# Altium PCB 6-Safety-Relay-PCB.PcbDoc
Units mm, origin at the board's own origin, x right, y up, seen from the top; angles counter-clockwise.
Board outline 118.11 x 88.58 mm, 2 copper layers (Top Layer, Bottom Layer); 10 components, 29 nets, 101 pads, 13 vias.
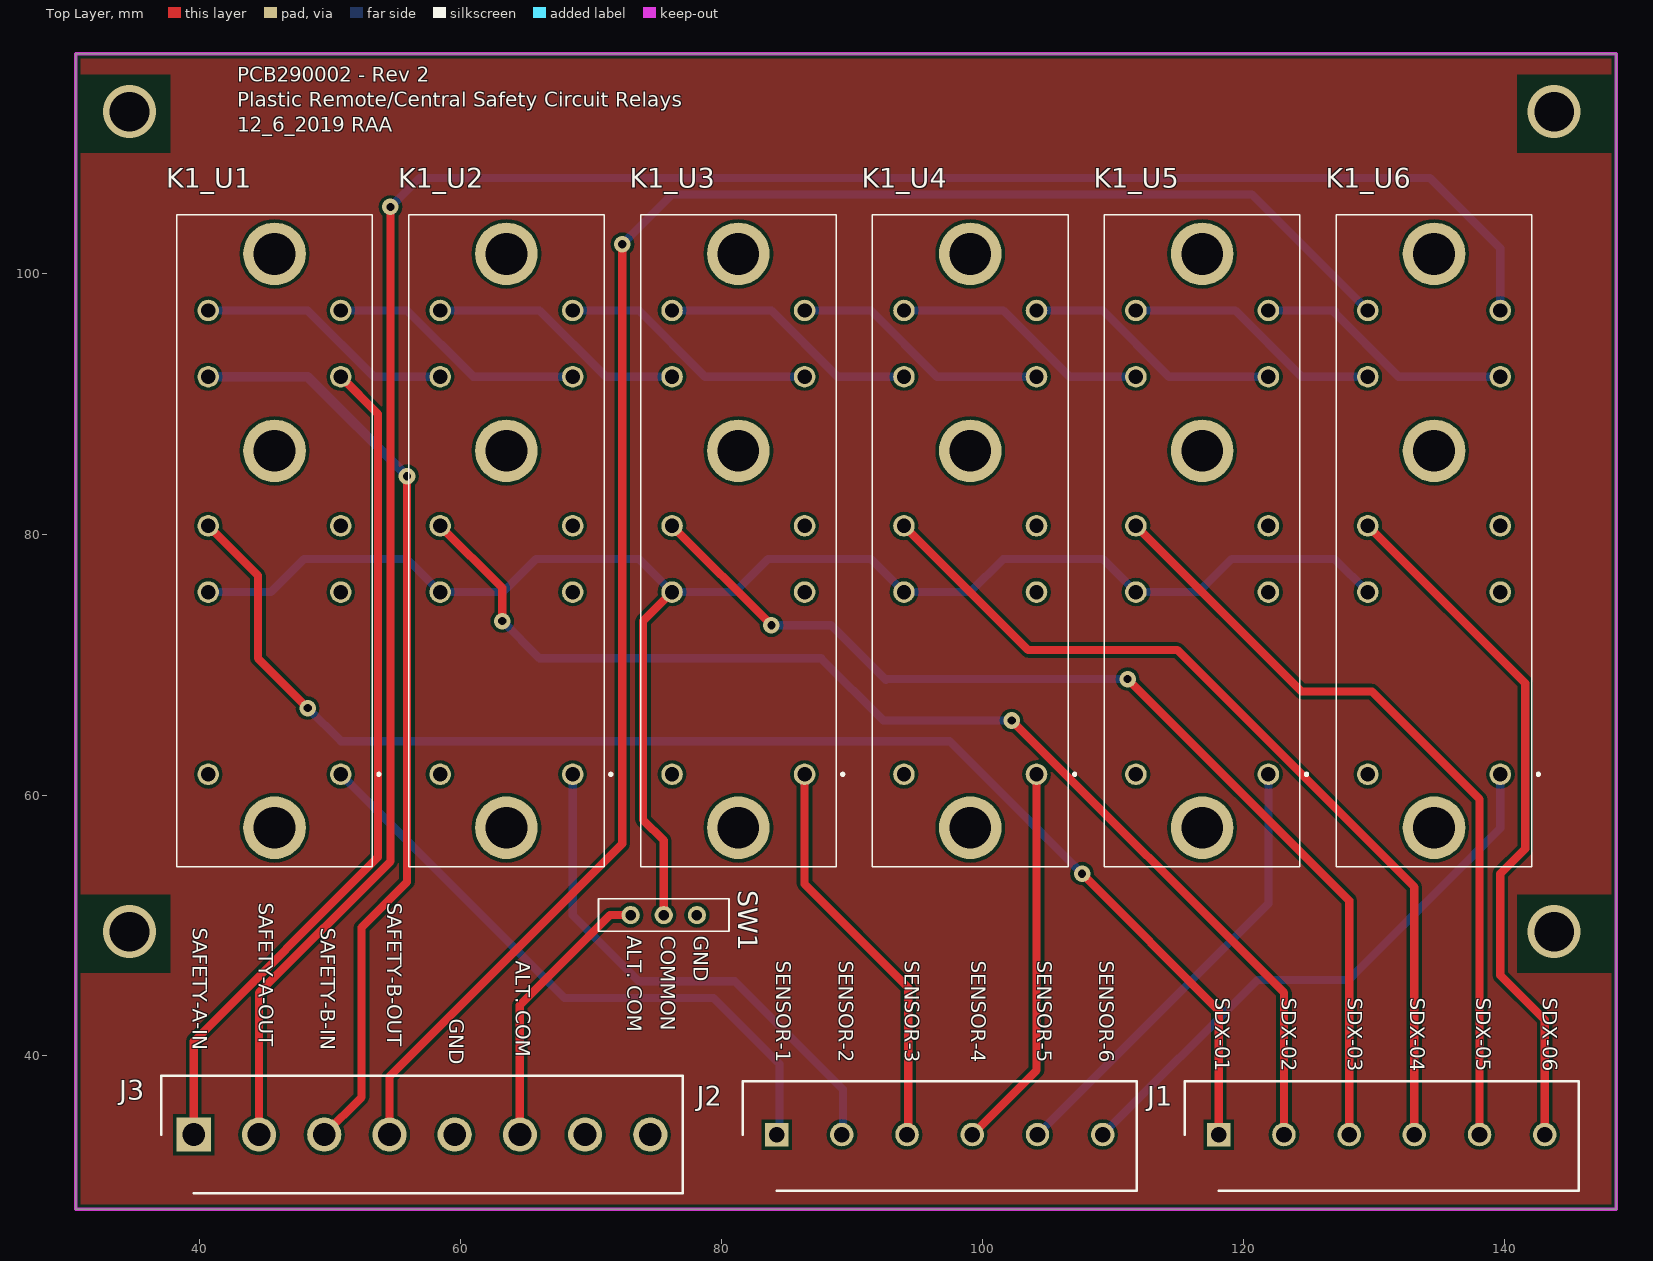
[diagram p0: Top Layer view]
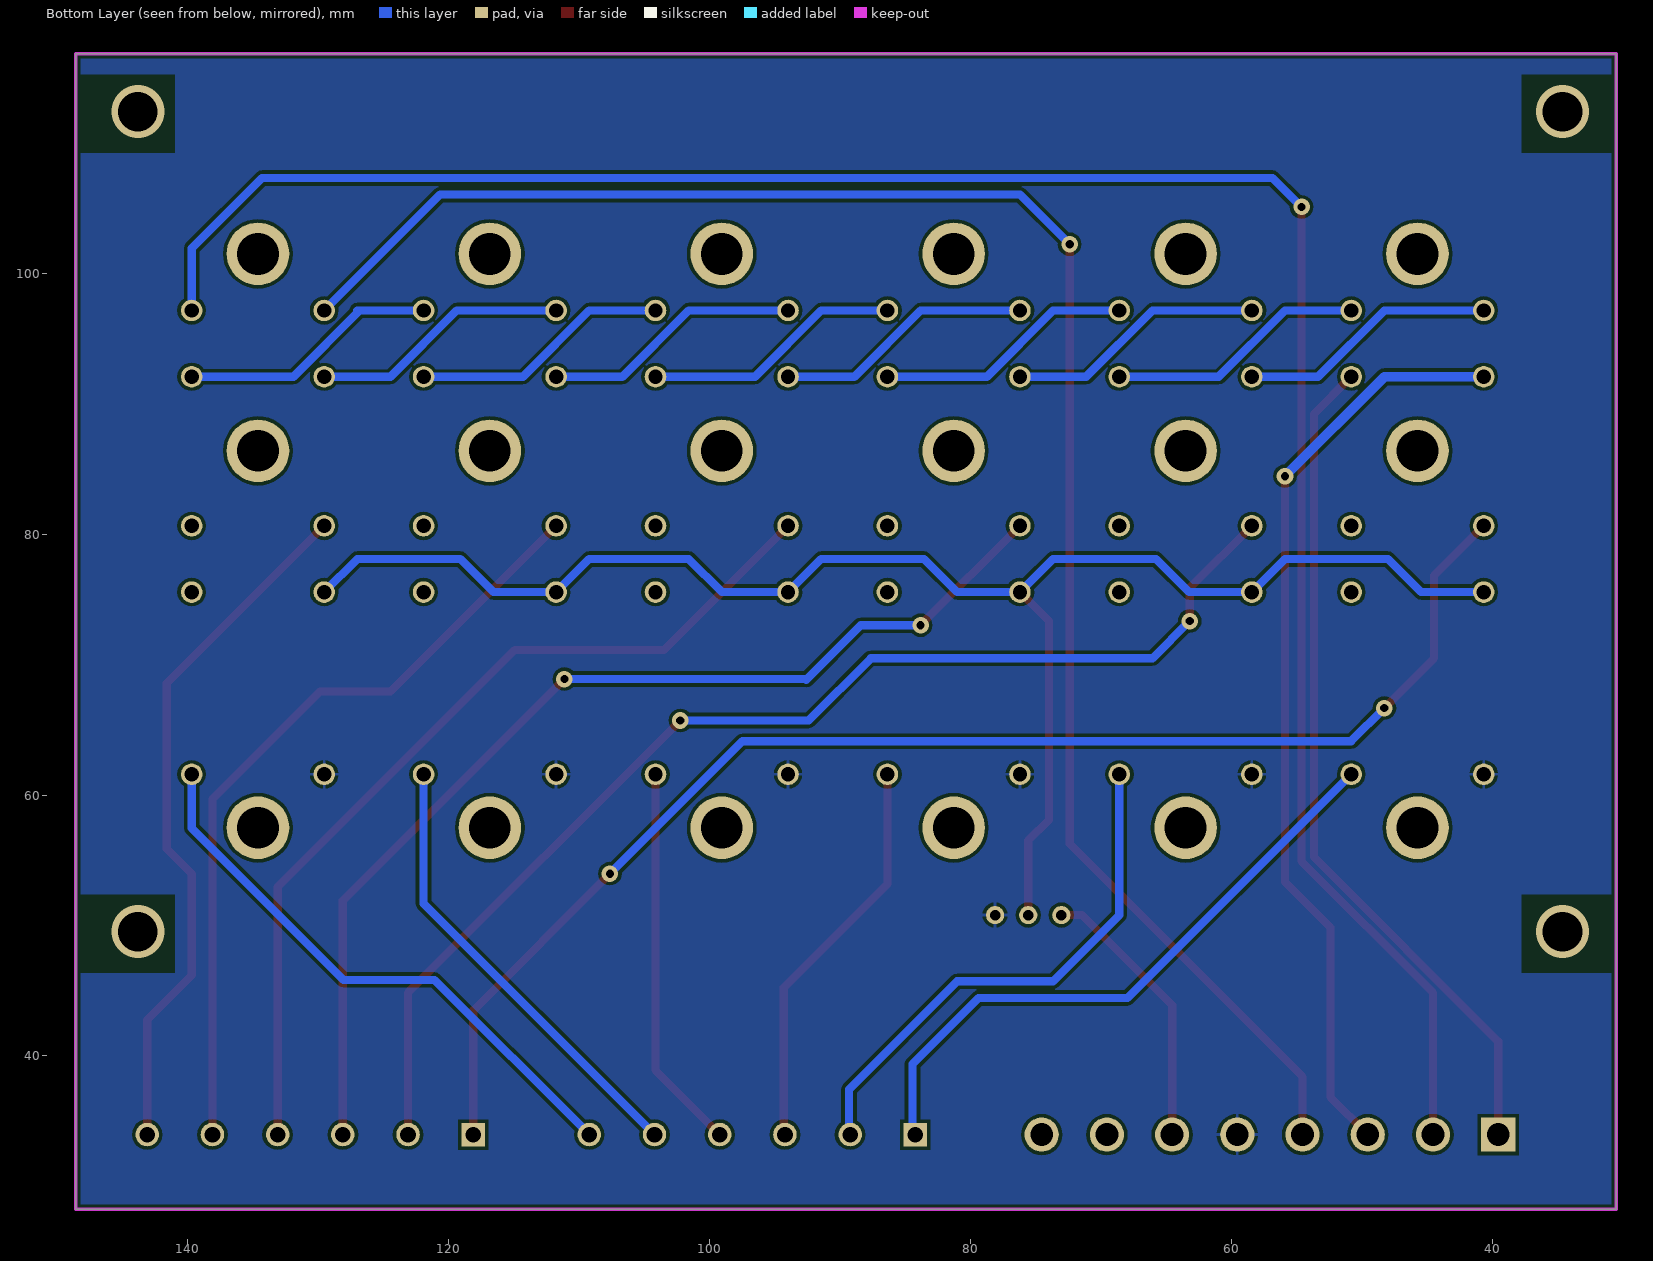
[diagram p1: Bottom Layer view, seen from below]
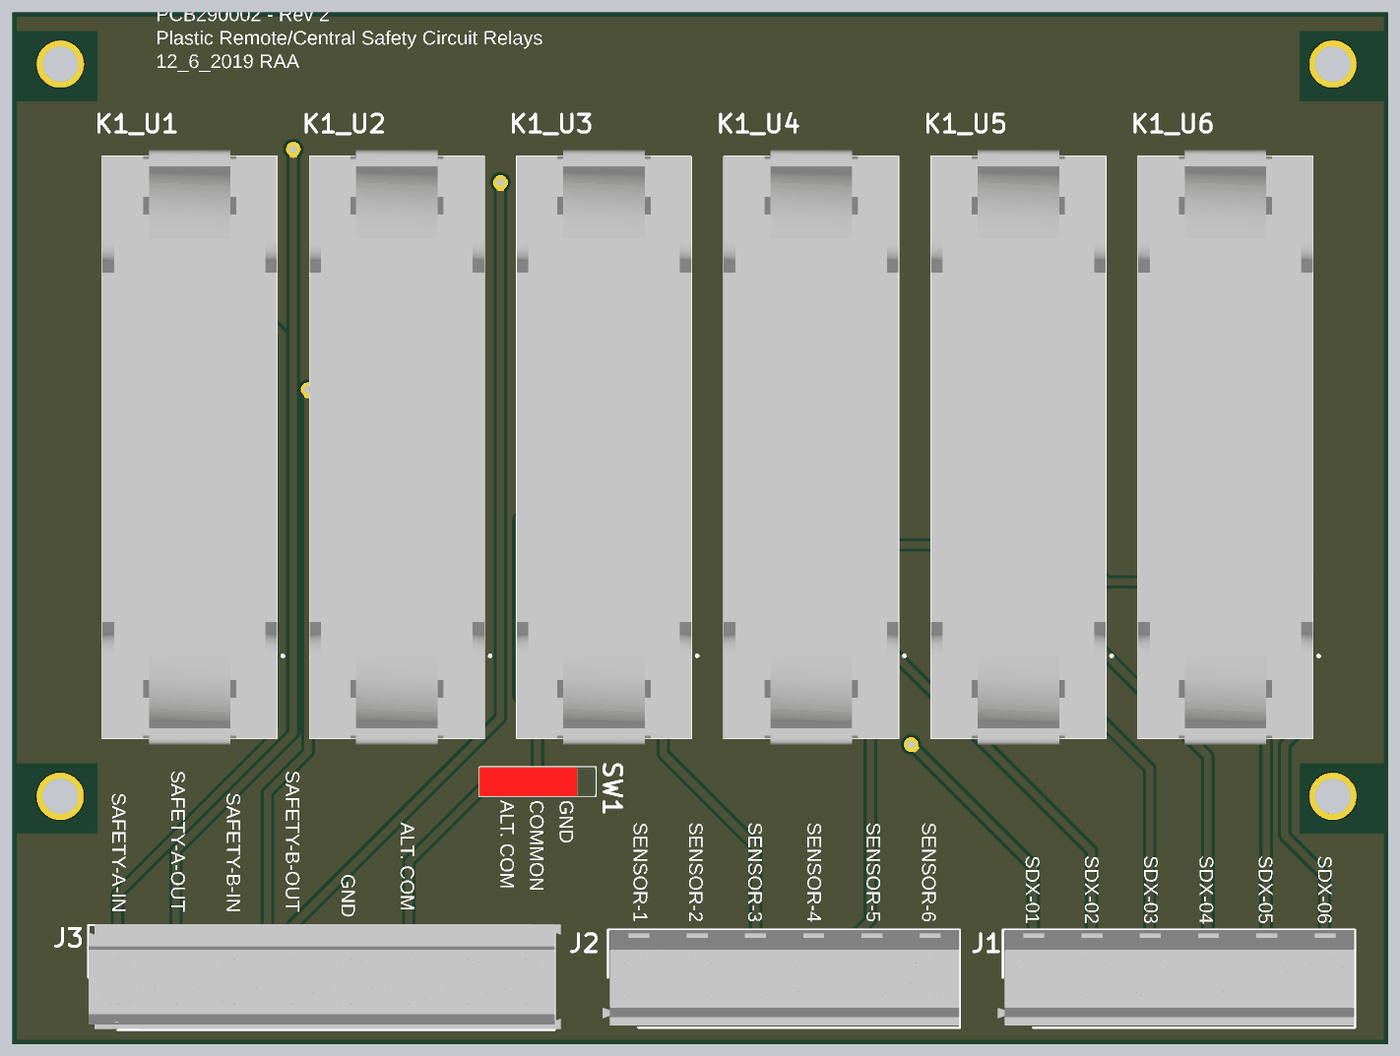
[diagram p2: 3D render of the assembled board from above, using the file's embedded part models]

## Layer stack, top to bottom
Top Solder: solder mask 0.0102, Solder Resist, Dk 3.5
Top Layer: signal copper 0.0356
Dielectric 1: dielectric 0.32, FR-4, Dk 4.8
Bottom Layer: signal copper 0.0356
Bottom Solder: solder mask 0.0102, Solder Resist, Dk 3.5

## Board outline
30.48,116.84 148.59,116.84 148.59,28.258 30.48,28.258

## Design rules (kind name [scope] priority, off if disabled: settings)
Clearance [All] p1: gap=0.254 ignorepadtopadclearanceinfootprint=FALSE except(0: Arc-Hole Track-Hole SMDPad-Hole THPad-Hole Via-Hole Fill-Hole Poly-Hole Region-Hole Text-Hole)
PolygonConnect [All] p1: connectstyle=Relief reliefconductorwidth=0.254 reliefentries=4 polygonreliefangle="90 Angle" airgapwidth=0.254
RoutingVias [All] p1: holewidth=0.635 width=1.27 viastyle="Through Hole" minholewidth=0.254 minwidth=1.016 maxholewidth=1.27 maxwidth=2.54
SolderMaskExpansion [All] p1: expansion=0.102
Width [All] p1: maxlimit=3.81 minlimit=0.254 preferedwidth=0.635 minimp=50.000000 maximp=50.000000 favimp=50.000000
30 further rules are at their usual default settings.

## Classes and differential pairs
component class U9: K1_U6
channel class Safety-Relay-SubSch: U1 U2 U3 U4 U5 U6 U7
component class U5: K1_U5
component class U4: K1_U4
component class U3: K1_U3
component class U2: K1_U2
component class U1: K1_U1
component class Safety-Relay-Schematic: J3 SW1

## Components (designator, comment, footprint, x,y, rotation, side; value= is the part's Value field where it differs from the comment)
J1 "282836-6" SHDR6W100P0X500_1X6_3000X820X1000P 118.11,33.972 r0 top
J2 "282836-6" SHDR6W100P0X500_1X6_3000X820X1000P 84.217,33.972 r0 top
J3 "796683-8" SHDR8W110P0X500_1X8_4000X900X1520P 39.532,33.972 r0 top
K1_U1 "P7SA-10P_(G7SA-3A1B)" P7SA10PG7SA2A2B 45.72,79.495 r90 top (schematic designator K1)
K1_U2 "P7SA-10P_(G7SA-3A1B)" P7SA10PG7SA2A2B 63.5,79.495 r90 top (schematic designator K1)
K1_U3 "P7SA-10P_(G7SA-3A1B)" P7SA10PG7SA2A2B 81.28,79.495 r90 top (schematic designator K1)
K1_U4 "P7SA-10P_(G7SA-3A1B)" P7SA10PG7SA2A2B 99.06,79.495 r90 top (schematic designator K1)
K1_U5 "P7SA-10P_(G7SA-3A1B)" P7SA10PG7SA2A2B 116.84,79.495 r90 top (schematic designator K1)
K1_U6 "P7SA-10P_(G7SA-3A1B)" P7SA10PG7SA2A2B 134.62,79.495 r90 top (schematic designator K1)
SW1 "450301014042" 450301014042 75.565,50.8 r0 top

## Footprints (in the part's own frame and the unit in brackets; to place one, negate y for a bottom-side part, rotate by r counter-clockwise, add the part's x,y. Pads: shape width x height; smd on the part's side, far side on the other; paste and mask are expansions set on the pad)
450301014042 [mm] "10mm*2.5mm. SPDT, ON-ON, 2.54mm, horizontal type, THT, bulk"
  round 1.4 hole 0.8: 1(0,0) 2(-2.54,0) 3(2.54,0)
  silkscreen extent -5,-1.25 5,1.25, body extent -5,-1.25 5,1.25, height 6.4
P7SA10PG7SA2A2B [mm]
  round 1.65 hole 1.1: 1(-17.9,-5.08) 2(-3.93,-5.08) 3(1.15,-5.08) 4(12.58,-5.08) 5(17.66,-5.08) 6(17.66,5.08) 7(12.58,5.08) 8(1.15,5.08) 9(-3.93,5.08) 10(-17.9,5.08)
  round 4.8 hole 3.2: MH1(-22,0) MH2(6.9,0) MH3(22,0)
  silkscreen extent -25,-8.1 25,7.5, body extent -25.5,-7.5 25.51,7.5, height 40.71
SHDR6W100P0X500_1X6_3000X820X1000P [mm]
  rect 1.8x1.8 hole 1.2: 1(0,0)
  round 1.8 hole 1.2: 2(5,0) 3(10,0) 4(15,0) 5(20,0) 6(25,0)
  silkscreen extent -2.6,-4.3 27.6,4.1, body extent -3.05,-4.1 27.55,4.1, height 10.01
SHDR8W110P0X500_1X8_4000X900X1520P [mm]
  rect 2.625x2.625 hole 1.75: 1(0,0)
  round 2.625 hole 1.75: 2(5,0) 3(10,0) 4(15,0) 5(20,0) 6(25,0) 7(30,0) 8(35,0)
  silkscreen extent -2.5,-4.5 37.5,4.5, body extent -2.47,-4.43 38.03,4.57, height 15.01

## Part data
J1 J2: "Connector", Manufacturer_Name="TE Connectivity", Mouser Part Number=571-2828366, RS Part Number=3617702, Allied_Number=70088849, Allied Price/Stock=https://www.alliedelec.com/te-connectivity-282836-6/70088849/, Datasheet Link=http://www.mouser.com/ds/2/418/NG_CD_282836_H10-625726.pdf, Height=10mm, Manufacturer_Part_Number=282836-6, Mouser Price/Stock=https://www.mouser.com/Search/Refine.aspx?Keyword=571-2828366, RS Price/Stock=http://uk.rs-online.com/web/p/products/3617702
J3: "Connector", Manufacturer_Name="TE Connectivity", Mouser Part Number=571-796683-8, Datasheet Link=http://www.te.com/commerce/DocumentDelivery/DDEController?Action=srchrtrv&DocNm=796683&DocType=Customer+Drawing&DocLang=English, Height=15.2mm, Manufacturer_Part_Number=796683-8, Mouser Price/Stock=https://www.mouser.com/Search/Refine.aspx?Keyword=571-796683-8
K1_U1 K1_U2 K1_U3 K1_U4 K1_U5 K1_U6: "Relay or Contactor", Manufacturer_Name="Omron Electronics", Manufacturer_Part_Number="P7SA-10P (G7SA-3A1B)", Mouser Part Number=653-P7SA-10P, Allied_Number=70033653, Allied Price/Stock=https://www.alliedelec.com/omron-safety-sti-p7sa-10p/70033653/, Datasheet Link=http://www.ia.omron.com/data_pdf/cat/g7sa_j120-e1_12_1_csm1269.pdf, Mouser Price/Stock=https://www.mouser.com/Search/Refine.aspx?Keyword=653-P7SA-10P
SW1: library part CMP-1466-00001-1, "WS-SLTV 10mm*2.5mm, SPDT, ON-ON, 2.54mm, straight type, THT, Mini Slide Switch, 3 pins", Manufacturer="Wuerth Elektronik", ComponentLink1Description="Manufacturer URL", ComponentLink1URL=http://www.we-online.com, ComponentLink2Description=Datasheet, ComponentLink2URL=http://katalog.we-online.de/em/datasheet/450301014042.pdf, NoPins=06, PackageReference=450301014042, PartNumber=450301014042

## Via types
v1: diameter 1.27, hole 0.635, Top Layer to Bottom Layer, 9 vias
v2: diameter 4.064, hole 3.048, Top Layer to Bottom Layer, 4 vias

## Nets (pads, with @x,y where several pads share a name; then routed paths per layer and width w, separated by ;. In a path a pad name is that pad's centre, name@x,y a point inside that pad or via, vN(x,y) a via of type N, cw(c..) or ccw(c..) an arc to the next point about the centre after c; other vN are vias at no path point)
COM-IN: J3.6 SW1.2 | length 21.3
  Top Layer w0.635: J3.6 64.532,43.895 71.438,50.8 SW1.2
COMMON: K1_U1.9 K1_U2.9 K1_U3.9 K1_U4.9 K1_U5.9 K1_U6.9 SW1.1 | length 125.8
  Top Layer w0.635: SW1.1 75.565,56.515 73.977,58.102 73.977,73.343 K1_U3.9
  Bottom Layer w0.635: K1_U1.9 45.448,75.565 47.988,78.105 55.88,78.105 K1_U2.9 63.228,75.565 65.768,78.105 73.66,78.105 K1_U3.9 81.008,75.565 83.548,78.105 91.44,78.105 K1_U4.9 99.06,75.565 101.6,78.105 109.22,78.105 K1_U5.9 116.568,75.565 119.108,78.105 127,78.105 K1_U6.9
GND: J3.5 K1_U1.10 K1_U2.10 K1_U3.10 K1_U4.10 K1_U5.10 K1_U6.10 SW1.3
NetK1_U1_5: K1_U1.5 K1_U2.4 | length 19.9
  Bottom Layer w0.635: K1_U1.5 55.88,97.155 60.96,92.075 K1_U2.4
NetK1_U1_6: K1_U1.6 K1_U2.7 | length 19.9
  Bottom Layer w0.635: K1_U1.6 48.26,97.155 53.34,92.075 K1_U2.7
NetK1_U2_5: K1_U2.5 K1_U3.4 | length 19.9
  Bottom Layer w0.635: K1_U2.5 73.66,97.155 78.74,92.075 K1_U3.4
NetK1_U2_6: K1_U2.6 K1_U3.7 | length 19.9
  Bottom Layer w0.635: K1_U2.6 66.04,97.155 71.12,92.075 K1_U3.7
NetK1_U3_5: K1_U3.5 K1_U4.4 | length 19.9
  Bottom Layer w0.635: K1_U3.5 91.44,97.155 96.52,92.075 K1_U4.4
NetK1_U3_6: K1_U3.6 K1_U4.7 | length 19.9
  Bottom Layer w0.635: K1_U3.6 83.82,97.155 88.9,92.075 K1_U4.7
NetK1_U4_5: K1_U4.5 K1_U5.4 | length 19.9
  Bottom Layer w0.635: K1_U4.5 109.22,97.155 114.3,92.075 K1_U5.4
NetK1_U4_6: K1_U4.6 K1_U5.7 | length 19.9
  Bottom Layer w0.635: K1_U4.6 101.6,97.155 106.68,92.075 K1_U5.7
NetK1_U5_5: K1_U5.5 K1_U6.4 | length 28
  Bottom Layer w0.635: K1_U5.5 127,97.155 ; 126.82,97.155 131.9,92.075 K1_U6.4@140.017,92.075 ; 132.08,92.075 K1_U6.4
NetK1_U5_6: K1_U5.6 K1_U6.7 | length 19.9
  Bottom Layer w0.635: K1_U5.6 119.38,97.155 124.46,92.075 K1_U6.7
SAFETY-A-IN: J3.1 K1_U1.4 | length 65.1
  Top Layer w0.635: J3.1 39.532,41.12 53.657,55.245 53.657,89.218 K1_U1.4
SAFETY-A-OUT: J3.2 K1_U6.5 | length 168.3
  Top Layer w0.635: J3.2 44.532,44.85 54.61,54.927 54.61,102.87 v1(54.61,105.093)
  Bottom Layer w0.635: v1(54.61,105.093) 56.832,107.315 134.302,107.315 139.7,101.917 K1_U6.5
SAFETY-B-IN: J3.3 K1_U1.7 | length 71.5
  Top Layer w0.635: J3.3 52.387,36.828 52.387,49.847 55.88,53.34 v1(55.88,84.455)
  Bottom Layer w0.762: K1_U1.7 48.26,92.075 v1(55.88,84.455)
SAFETY-B-OUT: J3.4 K1_U6.6 | length 138.1
  Top Layer w0.635: J3.4 54.532,38.414 72.39,56.272 v1(72.39,102.235)
  Bottom Layer w0.635: v1(72.39,102.235) 76.2,106.045 120.65,106.045 K1_U6.6
SDX-O1: J1.1 K1_U1.8 | length 106.1
  Top Layer w0.635: K1_U1.8 44.45,76.835 44.45,70.485 v1(48.26,66.675) ; v1(107.632,53.975) 118.11,43.497 J1.1
  Bottom Layer w0.635: v1(48.26,66.675) 50.8,64.135 97.472,64.135 v1(107.632,53.975)
SDX-O2: J1.2 K1_U2.8 | length 91.9
  Top Layer w0.635: K1_U2.8 63.182,75.882 v1(63.182,73.343) ; v1(102.235,65.722) 123.11,44.847 J1.2
  Bottom Layer w0.635: v1(63.182,73.343) 66.04,70.485 87.63,70.485 92.392,65.722 v1(102.235,65.722)
SDX-O3: J1.3 K1_U3.8 | length 81.6
  Top Layer w0.635: K1_U3.8 v1(83.82,73.025) ; v1(111.125,68.897) 128.11,51.912 J1.3
  Bottom Layer w0.635: v1(83.82,73.025) 88.402,73.025 92.584,68.843 ; 92.71,68.897 v1(111.125,68.897)
SDX-O4: J1.4 K1_U4.8 | length 69.6
  Top Layer w0.635: K1_U4.8 103.505,71.12 114.935,71.12 133.11,52.945 J1.4
SDX-O5: J1.5 K1_U5.8 | length 60.7
  Top Layer w0.635: K1_U5.8 124.46,67.945 129.857,67.945 138.11,59.692 J1.5
SDX-O6: J1.6 K1_U6.8 | length 53.9
  Top Layer w0.635: K1_U6.8 141.605,68.58 141.605,55.88 139.7,53.975 139.7,46.182 143.11,42.772 J1.6
SENSOR-1: J2.1 K1_U1.1 | length 48.3
  Bottom Layer w0.635: K1_U1.1 67.945,44.45 79.38,44.45 84.44,39.39 J2.1@84.44,33.972
SENSOR-2: J2.2 K1_U2.1 | length 40.5
  Bottom Layer w0.635: K1_U2.1 68.58,50.8 73.66,45.72 81.018,45.72 89.297,37.441 J2.2@89.297,33.972
SENSOR-3: J2.3 K1_U3.1 | length 30.9
  Top Layer w0.635: K1_U3.1 86.36,53.185 94.297,45.248 J2.3@94.297,33.972
SENSOR-4: J2.4 K1_U4.1 | length 29.7
  Top Layer w0.635: J2.4 104.14,38.895 K1_U4.1
SENSOR-5: J2.5 K1_U5.1 | length 35
  Bottom Layer w0.635: J2.5 121.92,51.675 K1_U5.1
SENSOR-6: J2.6 K1_U6.1 | length 44.3
  Bottom Layer w0.635: J2.6 121.078,45.833 128.063,45.833 139.7,57.47 K1_U6.1
pads on no net: J3.7 J3.8 K1_U1.2 K1_U1.3 K1_U1.MH1 K1_U1.MH2 K1_U1.MH3 K1_U2.2 K1_U2.3 K1_U2.MH1 K1_U2.MH2 K1_U2.MH3 K1_U3.2 K1_U3.3 K1_U3.MH1 K1_U3.MH2 K1_U3.MH3 K1_U4.2 K1_U4.3 K1_U4.MH1 K1_U4.MH2 K1_U4.MH3 K1_U5.2 K1_U5.3 K1_U5.MH1 K1_U5.MH2 K1_U5.MH3 K1_U6.2 K1_U6.3 K1_U6.MH1 K1_U6.MH2 K1_U6.MH3
copper on no net:
  other v2: 34.608,49.53 143.827,49.53 34.612,112.395 143.832,112.395

## Polygon pours and split planes (outlines as drawn)
GND on Bottom Layer "Bottom Layer-GND" (solid, pour order 2): 30.48,116.84 148.59,116.84 148.59,28.258 30.48,28.258
no net on Top Layer "Top Layer-+24VDC" (solid, pour order 0): 148.59,28.258 148.59,116.84 30.48,116.84 30.48,28.258

## Keep-outs
Top Layer:
  region: 132.715,116.84
Keep-Out Layer:
  the board outline again, w0.254

## Other copper
Top Layer:
  pour cut-out: 140.97,46.355 148.59,46.355 148.59,52.387 140.97,52.387
  pour cut-out: 140.97,109.22 148.59,109.22 148.59,115.252 140.97,115.252
  pour cut-out: 30.48,46.355 37.782,46.355 37.782,52.387 30.48,52.387
  pour cut-out: 30.48,109.22 37.782,109.22 37.782,115.252 30.48,115.252
Bottom Layer:
  pour cut-out: 140.97,46.355 148.59,46.355 148.59,52.387 140.97,52.387
  pour cut-out: 140.97,109.22 148.59,109.22 148.59,115.252 140.97,115.252
  pour cut-out: 30.48,46.355 37.782,46.355 37.782,52.387 30.48,52.387
  pour cut-out: 30.48,109.22 37.782,109.22 37.782,115.252 30.48,115.252

## Silkscreen, mask and mechanical layers (free items; w line width, h text height)
Top Overlay:
  text "PCB290002 - Rev 2 / Plastic Remote/Central Safety Circuit Relays / 12_6_2019 RAA" at 42.862,110.49 h1.91
  text "SAFETY-A-OUT" at 44.133,51.752 h1.91 r270
  text "SAFETY-B-OUT" at 53.975,51.752 h1.91 r270
  text "SAFETY-A-IN" at 39.052,49.847 h1.91 r270
  text "SAFETY-B-IN" at 48.895,49.847 h1.91 r270
  text "ALT. COM" at 72.39,49.212 h1.91 r270
  text "COMMON" at 74.93,49.212 h1.91 r270
  text "GND" at 77.47,49.212 h1.91 r270
  text "ALT. COM" at 63.817,47.307 h1.91 r270
  text "SENSOR-1" at 83.82,47.307 h1.91 r270
  text "SENSOR-2" at 88.582,47.307 h1.91 r270
  text "SENSOR-3" at 93.662,47.307 h1.91 r270
  text "SENSOR-4" at 98.742,47.307 h1.91 r270
  text "SENSOR-5" at 103.822,47.307 h1.91 r270
  text "SENSOR-6" at 108.585,47.307 h1.91 r270
  text "SDX-01" at 117.475,44.45 h1.91 r270
  text "SDX-02" at 122.555,44.45 h1.91 r270
  text "SDX-03" at 127.635,44.45 h1.91 r270
  text "SDX-04" at 132.398,44.45 h1.91 r270
  text "SDX-05" at 137.477,44.45 h1.91 r270
  text "SDX-06" at 142.558,44.45 h1.91 r270
  text "GND" at 58.737,42.862 h1.91 r270